# Altium PCB Hexbot_矩阵键盘.PcbDoc
Units mm, origin at the board's own origin, x right, y up, seen from the top; angles counter-clockwise.
Board outline 80.01 x 69.34 mm, 2 copper layers (Top Layer, Bottom Layer); 43 components, 24 nets, 106 pads, 21 vias.
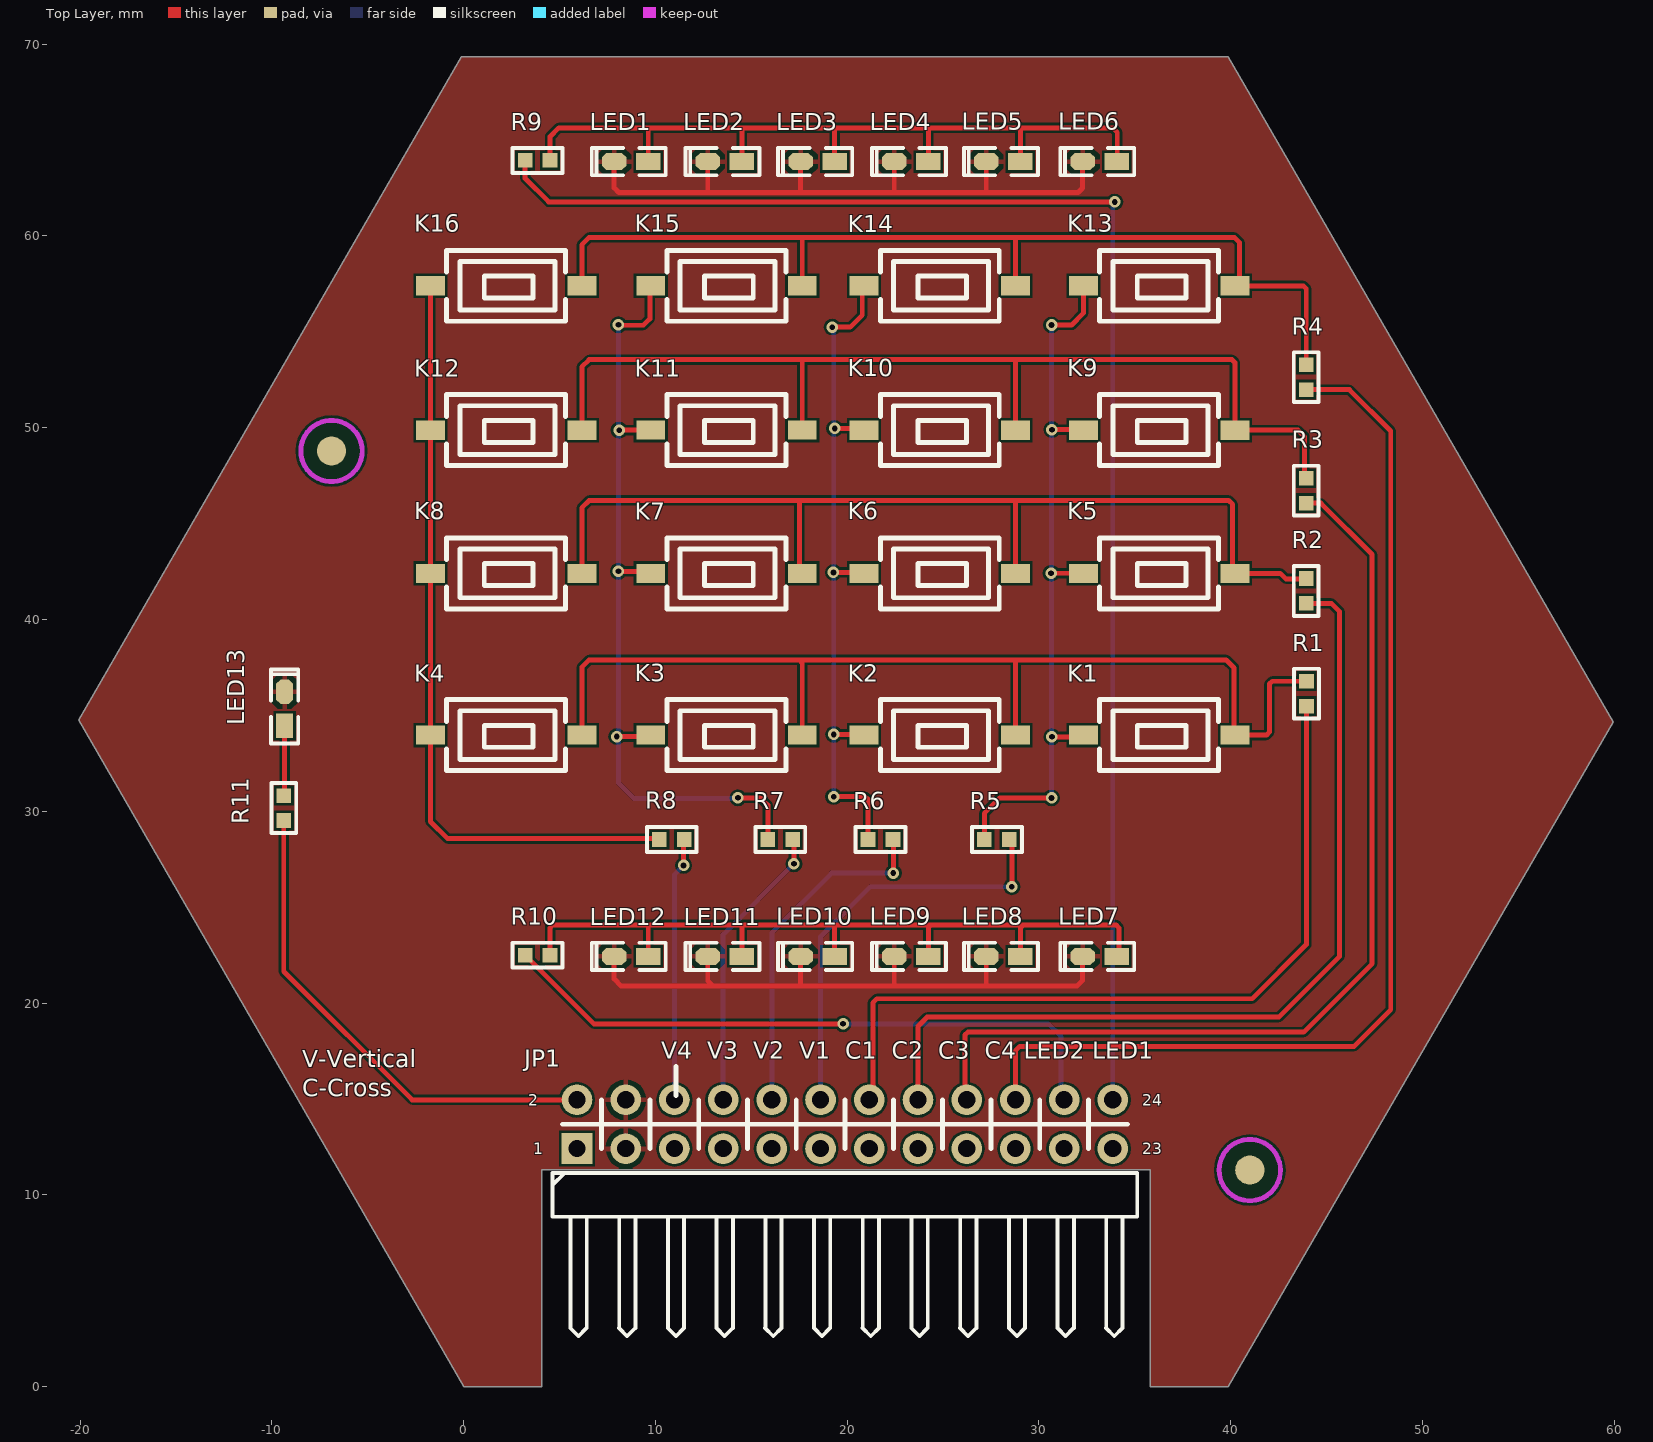
[diagram p0: Top Layer view]
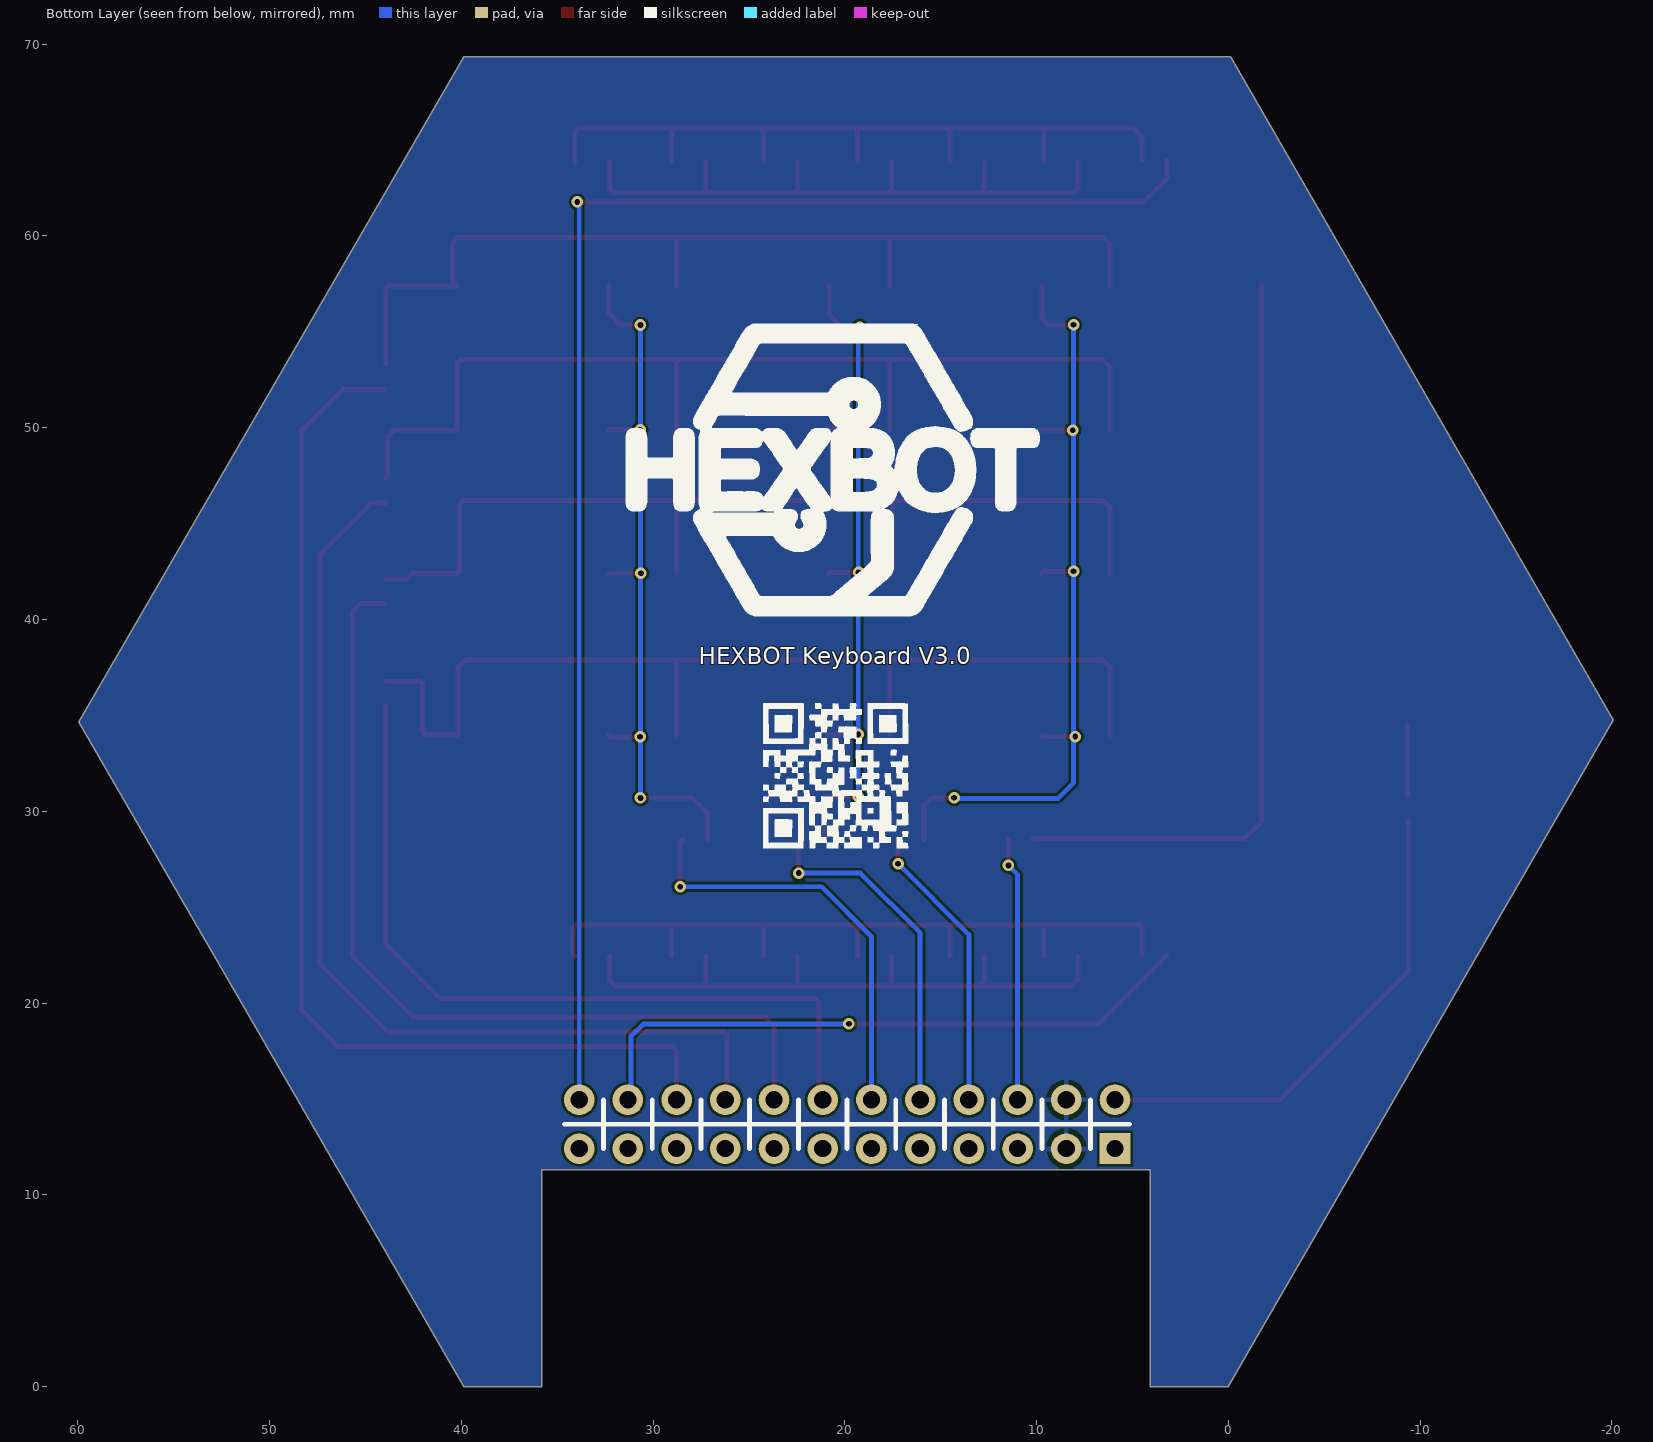
[diagram p1: Bottom Layer view, seen from below]

## Layer stack, top to bottom
Top Solder: solder mask 0.0102, Solder Resist, Dk 3.5
Top Layer: signal copper 0.0356
Dielectric 1: dielectric 0.32, FR-4, Dk 4.8
Bottom Layer: signal copper 0.0356
Bottom Solder: solder mask 0.0102, Solder Resist, Dk 3.5

## Board outline
0,0 -20.07,34.765 -0.12,69.342 39.878,69.342 59.944,34.661 39.878,0 35.814,0 35.814,11.294 4.064,11.294 4.064,0

## Design rules (kind name [scope] priority, off if disabled: settings)
Clearance [All] p1: gap=0.127 ignorepadtopadclearanceinfootprint=FALSE
ComponentClearance [All] p1: gap=0 collisioncheckmode=3 verticalgap=0.254 showdistances=FALSE
MinimumSolderMaskSliver [All] p1: minsoldermaskwidth=0
PolygonConnect [All] p1: connectstyle=Relief reliefconductorwidth=0.254 reliefentries=4 polygonreliefangle="90 Angle" airgapwidth=0.254
RoutingVias [All] p1: holewidth=0.254 width=0.508 viastyle="Through Hole" minholewidth=0.254 minwidth=0.508 maxholewidth=0.711 maxwidth=1.27
SilkToSilkClearance [All] p1: silktosilkclearance=0
SilkToSolderMaskClearance [IsPad] p1: minsilkscreentomaskgap=0 clearancetoexposedcopper=TRUE
SolderMaskExpansion [All] p1: expansion=0.102 istentingtop=FALSE
Width VCC/GND [InNetClass('New Class')] p1: maxlimit=0.508 minlimit=0.508 preferedwidth=0.508
Width [All] p2: maxlimit=0.254 minlimit=0.254 preferedwidth=0.254
26 further rules are at their usual default settings.

## Components (designator, comment, footprint, x,y, rotation, side; value= is the part's Value field where it differs from the comment)
JP1 "Header 2X11" HDR2.54-WI-2x12P 19.88,13.68 r0 top
K1 "轻触开关3*6*2.5" 按键开关 36.593,33.967 r180 top
K2 "轻触开关3*6*2.5" 按键开关 25.158,33.967 r180 top
K3 "轻触开关3*6*2.5" 按键开关 14.031,33.967 r180 top
K4 "轻触开关3*6*2.5" 按键开关 2.542,33.967 r180 top
K5 "轻触开关3*6*2.5" 按键开关 36.593,42.402 r180 top
K6 "轻触开关3*6*2.5" 按键开关 25.158,42.402 r180 top
K7 "轻触开关3*6*2.5" 按键开关 14.031,42.402 r180 top
K8 "轻触开关3*6*2.5" 按键开关 2.542,42.402 r180 top
K9 "轻触开关3*6*2.5" 按键开关 36.593,49.868 r180 top
K10 "轻触开关3*6*2.5" 按键开关 25.158,49.868 r180 top
K11 "轻触开关3*6*2.5" 按键开关 14.031,49.868 r180 top
K12 "轻触开关3*6*2.5" 按键开关 2.542,49.868 r180 top
K13 "轻触开关3*6*2.5" 按键开关 36.593,57.395 r180 top
K14 "轻触开关3*6*2.5" 按键开关 25.158,57.395 r180 top
K15 "轻触开关3*6*2.5" 按键开关 14.031,57.395 r180 top
K16 "轻触开关3*6*2.5" 按键开关 2.542,57.395 r180 top
LED1 "红色" "LED 0603R" 8.736,63.882 r180 top
LED2 "红色" "LED 0603R" 13.62,63.882 r180 top
LED3 "红色" "LED 0603R" 18.458,63.882 r180 top
LED4 "红色" "LED 0603R" 23.343,63.882 r180 top
LED5 "红色" "LED 0603R" 28.141,63.882 r180 top
LED6 "红色" "LED 0603R" 33.164,63.882 r180 top
LED7 "红色" "LED 0603R" 33.164,22.439 r180 top
LED8 "红色" "LED 0603R" 28.141,22.439 r180 top
LED9 "红色" "LED 0603R" 23.343,22.439 r180 top
LED10 "红色" "LED 0603R" 18.458,22.439 r180 top
LED11 "红色" "LED 0603R" 13.62,22.439 r180 top
LED12 "红色" "LED 0603R" 8.736,22.439 r180 top
LED13 "红色" "LED 0603R" -9.327,35.341 r90 top
mark1 "Mark" Mark -6.891,48.785 r90 top
mark2 "Mark" Mark 40.993,11.288 r90 top
R1 "1K" "R 0603_L" 43.947,36.132 r90 top
R2 "1K" "R 0603_L" 43.934,41.489 r90 top
R3 "1K" "R 0603_L" 43.934,46.714 r90 top
R4 "1K" "R 0603_L" 43.934,52.635 r90 top
R5 "1K" "R 0603_L" 27.806,28.528 r180 top
R6 "1K" "R 0603_L" 21.735,28.528 r180 top
R7 "1K" "R 0603_L" 16.51,28.528 r180 top
R8 "1K" "R 0603_L" 10.85,28.528 r180 top
R9 "1K" "R 0603_L" 3.855,63.936 r180 top
R10 "1K" "R 0603_L" 3.855,22.494 r180 top
R11 "1K" "R 0603_L" -9.379,30.167 r270 top

## Footprints (in the part's own frame and the unit in brackets; to place one, negate y for a bottom-side part, rotate by r counter-clockwise, add the part's x,y. Pads: shape width x height; smd on the part's side, far side on the other; paste and mask are expansions set on the pad)
HDR2.54-WI-2x12P [mm] "双排弯脚排针，12x2脚  淘宝ID:黄晶宝石   店铺网址:https://shop463601444.taobao.com"
  rect 1.6x1.6 hole 0.9: 1(-13.97,-1.27)
  round 1.6 hole 0.9: 2(-13.97,1.27) 3(-11.43,-1.27) 4(-11.43,1.27) 5(-8.89,-1.27) 6(-8.89,1.27) 7(-6.35,-1.27) 8(-6.35,1.27) 9(-3.81,-1.27) 10(-3.81,1.27) 11(-1.27,-1.27) 12(-1.27,1.27) 13(1.27,-1.27) 14(1.27,1.27) 15(3.81,-1.27) 16(3.81,1.27) 17(6.35,-1.27) 18(6.35,1.27) 19(8.89,-1.27) 20(8.89,1.27) 21(11.43,-1.27) 22(11.43,1.27) 23(13.97,-1.27) 24(13.97,1.27)
  silkscreen extent -15.24,-11.06 15.24,1.27, body extent -15.24,-11.23 15.24,1.62, height 5.1
"LED 0603R" [mil] "红色0603LED                                           淘宝ID:黄晶宝石"
  rect 50x35 smd: 1(-35,0.26)
  oct 50x35 smd: 2(35,0.26)
  silkscreen extent -71,-28 81,28, body extent -31,-16 31,16, height 18
Mark [mil]
  round 60 smd mask+39.37: mark(0,0)
  Top Layer keep-out circle w10: c0,0 r62.99
"R 0603_L" [mil] "1/10W贴片电阻                 淘宝ID:黄晶宝石"
  rect 30x30 smd: 1(-25.59,0) 2(25.59,0)
  silkscreen extent -51,-26 51,26, body extent -31,-16 32,16, height 16
按键开关 [mm]
  rect 1.5x1 smd: 1(-3.622,-0.003) 2(4.278,-0.003)
  silkscreen extent -2.77,-1.85 3.43,1.85

## Part data
JP1: library part "Header 12X2", "12*2P接插件", BOM名称=12*2P接插件, 学习资源=https://shop463601444.taobao.com, 版权归属="封装库来自淘宝卖家 ID：黄晶宝石"
K1 K2 K3 K4 K5 K6 K7 K8 K9 K10 K11 K12 K13 K14 K15 K16: BOM_JLCPCB Part Class="Extended Part", BOM_Manufacturer=null, BOM_Manufacturer Part=轻触开关3*6*2.5, BOM_Supplier=LCSC, BOM_Supplier Part=C9900005901, Contributor=LCSC, spicePre=U, spiceSymbolName=轻触开关3*6*2.5
LED1 LED2 LED3 LED4 LED5 LED6 LED7 LED8 LED9 LED10 LED11 LED12 LED13: library part LED-SMD, "贴片LED", BOM名称=贴片LED, 学习资源=https://shop463601444.taobao.com, 版权归属="封装库来自淘宝 ID：黄晶宝石"
R1 R2 R3 R4 R5 R6 R7 R8 R9 R10 R11: library part R, "贴片电阻", BOM名称=贴片电阻, 封装库来自淘宝卖家 ID：黄晶宝石=其他店铺购入均为盗版，不享受售后技术支持服务，请立即申请退款, 版权归属="来自淘宝 ID：黄晶宝石", 联系售后=https://shop463601444.taobao.com

## Via types
v1: diameter 0.6, hole 0.3, Top Layer to Bottom Layer, tented both sides, 21 vias

## Nets (pads, with @x,y where several pads share a name; then routed paths per layer and width w, separated by ;. In a path a pad name is that pad's centre, name@x,y a point inside that pad or via, vN(x,y) a via of type N, cw(c..) or ccw(c..) an arc to the next point about the centre after c; other vN are vias at no path point)
3V3: JP1.1
5V: JP1.2 R11.2 | length 25.9
  Top Layer w0.254: R11.2 -9.379,21.643 -2.686,14.95 JP1.2
C_1: JP1.14 R1.1 | length 41.4
  Top Layer w0.254: JP1.14 21.335,15.136 21.335,20.015 21.54,20.22 41.116,20.22 43.947,23.05 R1.1
C_2: JP1.16 R2.1 | length 47.2
  Top Layer w0.254: JP1.16 23.69,18.795 24.161,19.266 42.512,19.266 45.678,22.433 45.678,40.409 45.248,40.839 R2.1
C_3: JP1.18 R3.1 | length 52.1
  Top Layer w0.254: JP1.18 26.136,15.044 26.136,18.332 26.285,18.481 43.803,18.481 47.374,22.052 47.374,43.386 44.696,46.064 R3.1
C_4: JP1.20 R4.1 | length 58.5
  Top Layer w0.254: JP1.20 28.77,17.508 29.004,17.742 46.435,17.742 48.344,19.651 48.344,49.829 46.188,51.985 R4.1
GND: JP1.3 JP1.4 LED1.2 LED2.2 LED3.2 LED4.2 LED5.2 LED6.2 LED7.2 LED8.2 LED9.2 LED10.2 LED11.2 LED12.2 LED13.2 | length 67.3
  Top Layer w0.254: LED12.2 7.847,21.255 8.218,20.884 13.009,20.884 ; LED1.2 7.847,62.505 8.089,62.262 12.807,62.262 ; LED11.2 12.731,21.161 13.009,20.884 ; LED2.2 12.731,62.338 12.807,62.262 ; LED10.2 17.569,20.92 17.532,20.884 ; LED3.2 17.569,62.307 17.525,62.262 ; LED9.2 22.454,20.981 22.551,20.884 ; LED4.2 22.454,62.318 22.398,62.262 ; 27.248,62.406 27.252,62.41 LED5.2 ; LED8.2 27.252,20.897 27.264,20.884 ; LED7.2 32.275,21.181 31.978,20.884 27.264,20.884 ; LED6.2 32.275,62.5 32.038,62.262 22.398,62.262 ; 12.807,62.262 17.525,62.262 ; 13.009,20.884 17.532,20.884 ; 17.525,62.262 22.398,62.262 ; 17.532,20.884 22.551,20.884 ; 22.551,20.884 27.264,20.884
LED1-6: JP1.24 R9.2 | length 79.1
  Top Layer w0.254: R9.2 3.205,62.995 4.428,61.772 v1(33.947,61.772)
  Bottom Layer w0.254: JP1.24 33.85,61.676 v1(33.947,61.772)
LED7-12: JP1.22 R10.2 | length 33.1
  Top Layer w0.254: R10.2 6.784,18.916 v1(19.785,18.916)
  Bottom Layer w0.254: v1(19.785,18.916) 30.492,18.916 31.147,18.26 31.147,15.112 JP1.22
NetK1_1: K1.1 K2.1 K3.1 K4.1 R1.2 | length 55.6
  Top Layer w0.254: K4.1 6.164,37.514 6.545,37.895 28.678,37.895 ; 17.602,37.763 17.653,37.712 K3.1 ; K2.1 28.78,37.793 28.678,37.895 ; R1.2 42.16,36.782 42.011,36.633 42.011,34.119 41.862,33.97 K1.1 40.169,34.016 40.169,37.479 39.753,37.895 28.678,37.895
NetK1_2: K1.2 K5.2 K9.2 K13.2 R5.2 | length 38.3
  Top Layer w0.254: R5.2 27.156,29.894 27.958,30.696 v1(30.654,30.696) ; v1(30.632,42.41) 32.31,42.41 K5.2 ; v1(30.654,55.355) 31.702,55.355 32.315,55.968 K13.2 ; v1(30.675,33.881) 32.225,33.881 K1.2 ; v1(30.675,49.899) 32.287,49.899 K9.2
  Bottom Layer w0.254: v1@30.617,30.659 v1(30.654,30.696) v1(30.654,55.355)
NetK2_2: K2.2 K6.2 K10.2 K14.2 R6.2 | length 36.6
  Top Layer w0.254: v1(19.221,55.243) 20.155,55.243 20.783,55.871 20.783,57.301 K14.2 ; v1(19.281,42.452) 20.833,42.452 K6.2 ; v1(19.296,30.762) 20.936,30.762 21.085,30.613 R6.2 ; v1(19.303,34.008) 20.842,34.008 K2.2 ; v1(19.345,49.963) 20.788,49.963 K10.2
  Bottom Layer w0.254: v1(19.221,55.243) 19.288,55.177 19.288,54.932 19.296,54.923 v1(19.296,30.762)
NetK3_2: K3.2 K7.2 K11.2 K15.2 R7.2 | length 42.7
  Top Layer w0.254: v1(7.988,33.894) 9.678,33.894 K3.2 ; v1(8.069,42.509) 9.65,42.509 K7.2 ; v1(8.07,55.365) 8.096,55.339 9.374,55.339 9.71,55.675 9.71,57.354 K15.2 ; v1(8.109,49.87) K11.2 K11.2 ; v1(14.303,30.7) 15.479,30.7 15.86,30.318 R7.2
  Bottom Layer w0.254: v1(8.07,55.365) 8.07,31.482 8.878,30.674 v1@14.303,30.674
NetK4_2: K4.2 K8.2 K12.2 K16.2 R8.2 | length 40.3
  Top Layer w0.254: K16.2 K12.2 K8.2 K4.2 -1.736,29.467 -0.839,28.57 10.159,28.57 R8.2
NetK5_1: K5.1 K6.1 K7.1 K8.1 R2.2 | length 52.8
  Top Layer w0.254: K8.1 6.164,45.825 6.545,46.206 17.504,46.206 ; K7.1 17.504,42.555 17.504,46.206 ; K6.1 28.78,46.124 28.698,46.206 ; R2.2 43.915,42.119 42.87,42.119 42.584,42.405 K5.1 40.1,42.52 40.1,45.998 39.892,46.206 28.698,46.206 ; 17.504,46.206 28.698,46.206
NetK9_1: K9.1 K10.1 K11.1 K12.1 R3.2 | length 54.5
  Top Layer w0.254: K12.1 6.164,53.173 6.541,53.55 17.66,53.55 ; K11.1 17.653,53.543 17.66,53.55 ; K10.1 28.78,53.467 28.863,53.55 ; R3.2 43.847,47.451 43.847,49.529 43.505,49.871 K9.1 40.215,53.401 40.066,53.55 28.863,53.55 ; 17.66,53.55 28.863,53.55
NetK13_1: K13.1 K14.1 K15.1 K16.1 R4.2 | length 51.9
  Top Layer w0.254: K16.1 6.164,59.541 6.545,59.922 17.709,59.922 ; K15.1 17.653,59.867 17.709,59.922 ; K14.1 28.78,59.83 28.872,59.922 ; R4.2 43.935,57.249 43.786,57.398 K13.1 40.461,57.644 40.461,59.649 40.188,59.922 28.872,59.922 ; 17.709,59.922 28.78,59.922 28.872,59.922
NetLED1_1: LED1.1 LED2.1 LED3.1 LED4.1 LED5.1 LED6.1 R9.1 | length 41.5
  Top Layer w0.254: R9.1 4.505,65.185 4.956,65.636 9.65,65.636 ; LED1.1 9.625,65.611 9.65,65.636 ; LED2.1 14.509,65.622 14.524,65.636 ; LED3.1 19.347,65.585 19.397,65.636 ; LED4.1 24.232,65.584 24.283,65.636 ; LED5.1 29.03,65.604 29.061,65.636 ; LED6.1 34.079,63.901 34.079,65.407 33.85,65.636 29.061,65.636 ; 9.65,65.636 14.524,65.636 ; 14.524,65.636 19.397,65.636 ; 19.397,65.636 24.283,65.636 ; 24.283,65.636 29.061,65.636
NetLED7_1: LED7.1 LED8.1 LED9.1 LED10.1 LED11.1 LED12.1 R10.1 | length 41.2
  Top Layer w0.254: R10.1 4.505,23.928 4.654,24.077 9.568,24.077 ; LED12.1 9.625,24.02 9.568,24.077 ; LED11.1 14.509,24.058 14.529,24.077 ; LED10.1 19.347,24.011 19.281,24.077 ; LED9.1 24.232,23.934 24.375,24.077 ; LED8.1 29.03,23.911 29.195,24.077 ; LED7.1 34.164,22.544 34.164,23.928 34.015,24.077 29.195,24.077 ; 9.568,24.077 14.529,24.077 ; 14.529,24.077 19.281,24.077 ; 19.281,24.077 24.375,24.077 ; 24.375,24.077 29.195,24.077
NetLED13_1: LED13.1 R11.1 | length 3.7
  Top Layer w0.254: R11.1 -9.334,30.862 LED13.1
R_1: JP1.12 R5.1 | length 22.1
  Top Layer w0.254: R5.1 28.585,28.399 v1(28.585,26.063)
  Bottom Layer w0.254: JP1.12 18.61,23.464 21.209,26.063 v1(28.585,26.063)
R_2: JP1.10 R6.1 | length 18.1
  Top Layer w0.254: R6.1 22.405,28.508 v1(22.405,26.775)
  Bottom Layer w0.254: JP1.10 16.07,23.657 19.187,26.775 v1(22.405,26.775)
R_3: JP1.8 R7.1 | length 15.1
  Top Layer w0.254: R7.1 17.222,28.466 v1(17.222,27.259)
  Bottom Layer w0.254: JP1.8 13.53,23.566 v1(17.222,27.259)
R_4: JP1.6 R8.1 | length 13.8
  Top Layer w0.254: v1(11.47,27.174) 11.47,28.498 R8.1
  Bottom Layer w0.254: JP1.6 10.99,26.693 v1(11.47,27.174)
pads on no net: JP1.5 JP1.7 JP1.9 JP1.11 JP1.13 JP1.15 JP1.17 JP1.19 JP1.21 JP1.23 mark1.mark mark2.mark

## Polygon pours and split planes (outlines as drawn)
GND on Top Layer "Top Layer-No Net" (solid, remove dead copper, pour order 4): 0,0 -20.07,34.765 -0.12,69.342 39.878,69.342 59.944,34.661 39.878,0 35.814,0 35.814,11.294 4.064,11.294 4.064,0
GND on Bottom Layer "Top Layer-No Net1" (solid, pour order 5): 0,0 -20.07,34.765 -0.12,69.342 39.878,69.342 59.944,34.661 39.878,0 35.814,0 35.814,11.294 4.064,11.294 4.064,0

## Silkscreen, mask and mechanical layers (free items; w line width, h text height)
Top Overlay:
  lines w0.254: 11.08,15.168 11.08,16.69
  text "V4  V3  V2  V1  C1  C2  C3  C4 LED2 LED1" at 10.316,16.77 h1.52
  text "V-Vertical / C-Cross" at -8.41,14.818 h1.52
Bottom Overlay:
  drawing of 2418 lines, arcs and shapes, not listed
  text "HEXBOT Keyboard V3.0" at 27.623,37.379 h1.5
Mechanical 1:
  the board outline again, w0.254

## Text inside footprints (layer, text, board x,y; h text height)
JP1: Top Overlay "24" at 35.374,14.442 h1.02; Top Overlay "23" at 35.374,11.902 h1.02; Top Overlay "2" at 3.37,14.442 h1.02; Top Overlay "1" at 3.624,11.902 h1.02